# Altium PCB Copy of moveWiFi.PcbDoc
Units mil, origin at the board's own origin, x right, y up, seen from the top; angles counter-clockwise.
Board outline 2297.03 x 1980.03 mil, 2 copper layers (Top Layer, Bottom Layer); 32 components, 24 nets, 161 pads, 21 vias.
Unrouted connection lines stored in the file: 11.
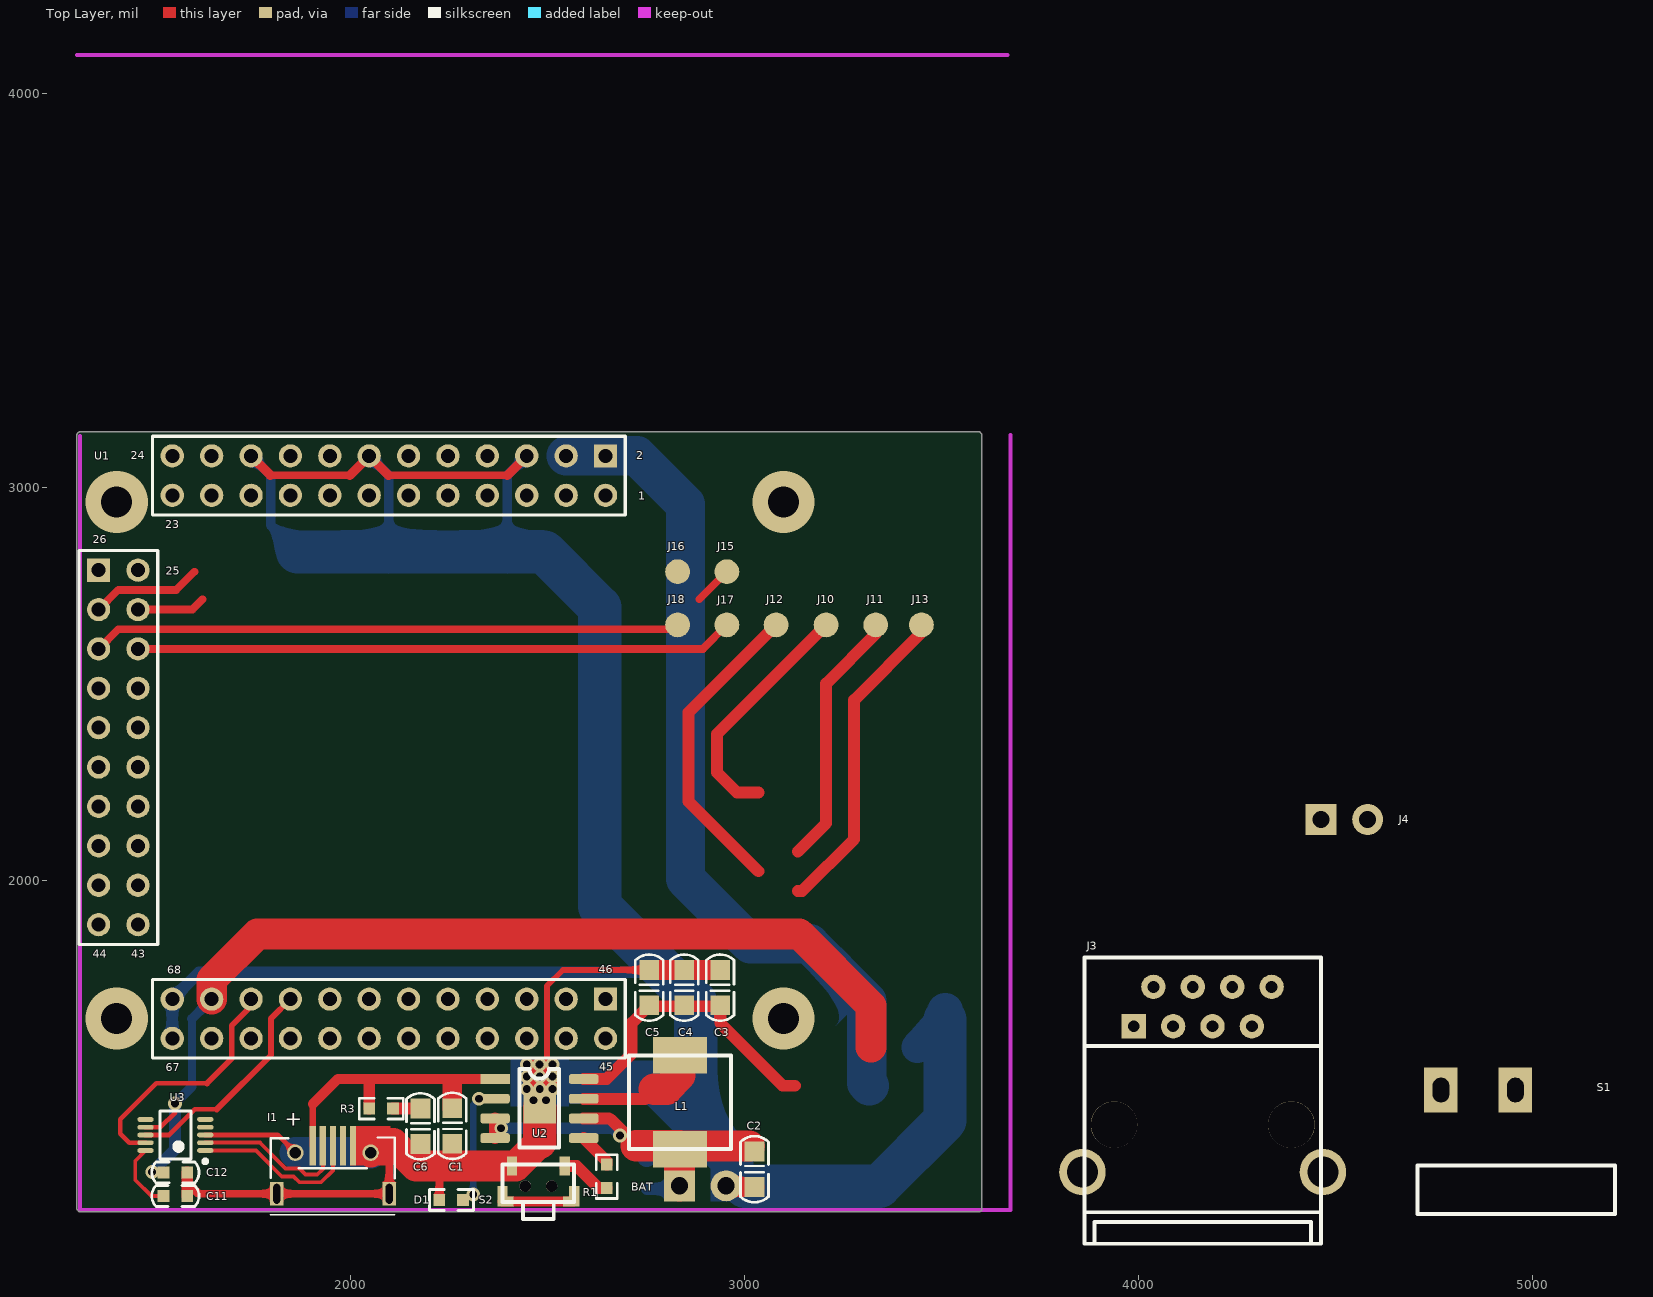
[diagram p0: Top Layer view]
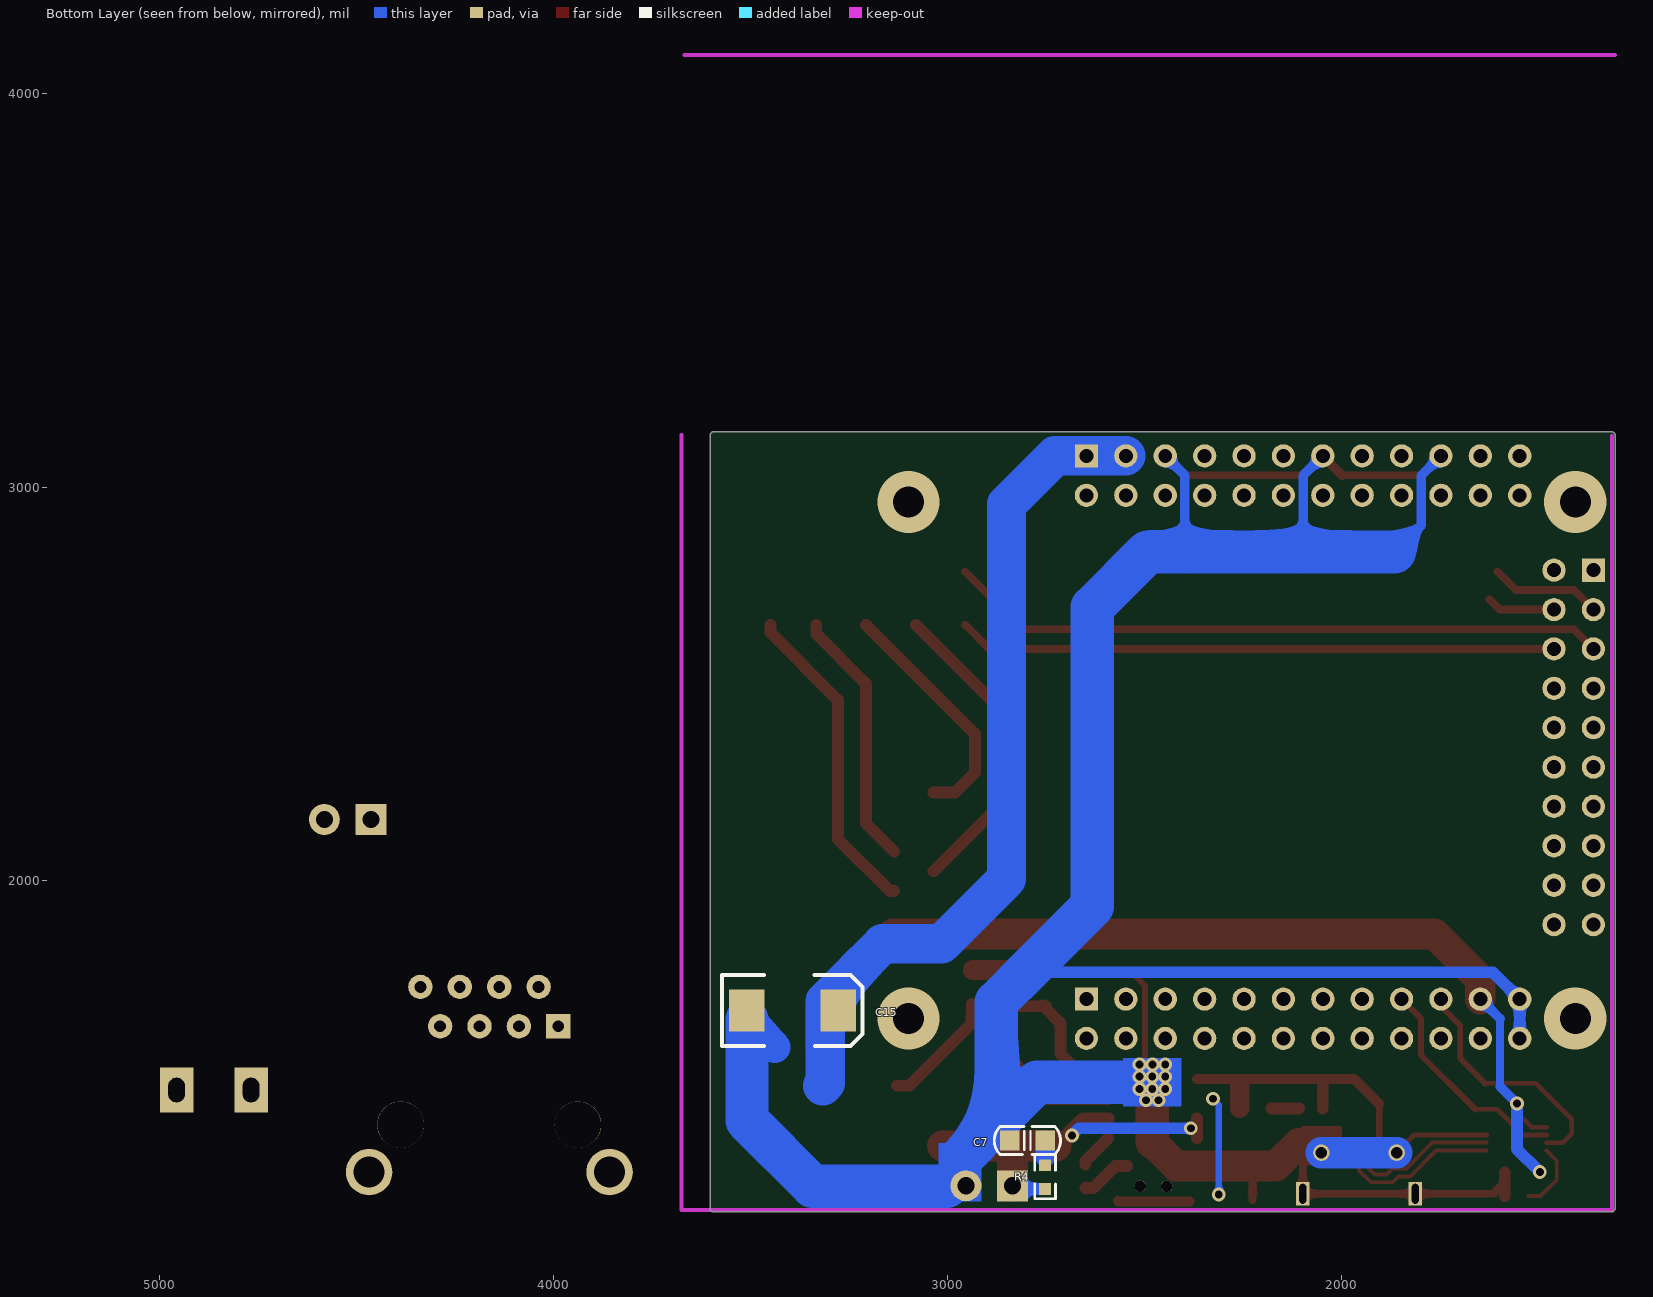
[diagram p1: Bottom Layer view, seen from below]

## Layer stack, top to bottom
Top Solder: solder mask 0.4, Solder Resist, Dk 3.5
Top Layer: signal copper 1.4
Dielectric 1: dielectric 12.6, FR-4, Dk 4.8
Bottom Layer: signal copper 1.4
Bottom Solder: solder mask 0.4, Solder Resist, Dk 3.5

## Board outline
1306.47,1164.44 cw(c1310,1168) 1304.98,1168 1304.98,3133 cw(c1310,3133) 1307.6,3137.4 cw(c1312,3135) 1312,3140.01 3595,3140.01 cw(c3595,3135) 3598.56,3138.53 3598.55,3138.55 3600.55,3136.55 3600.53,3136.56 cw(c3597,3133) 3602.01,3133 3602.01,1166 cw(c3597,1166) 3600.53,1162.44 3600.55,1162.45 3599.55,1161.45 3599.56,1161.47 cw(c3596,1165) 3596,1159.98 1313,1159.98 cw(c1313,1165) 1309.44,1161.47 1309.45,1161.45

## Design rules (kind name [scope] priority, off if disabled: settings)
Clearance [All] p1: gap=7 ignorepadtopadclearanceinfootprint=FALSE
ComponentClearance [All] p1: gap=0 collisioncheckmode=3 verticalgap=0 showdistances=FALSE
DiffPairsRouting [All] p1: maxlimit=10 minlimit=8 mostfreqgap=10 toplayer_minwidth=15 toplayer_maxwidth=15 toplayer_prefwidth=15 bottomlayer_minwidth=15 bottomlayer_maxwidth=15 bottomlayer_prefwidth=15 maxuncoupledlength=500
HoleSize [All] p1: absolutevalues=TRUE maxlimit=100 minlimit=12 maxpercent=80.000 minpercent=20.000
NetAntennae [All] p1: netantennaetolerance=10
PolygonConnect [All] p1: connectstyle=Relief reliefconductorwidth=10 reliefentries=4 polygonreliefangle="90 Angle" airgapwidth=10
RoutingVias [All] p1: holewidth=28 width=50 viastyle="Through Hole" minholewidth=28 minwidth=50 maxholewidth=28 maxwidth=50
SolderMaskExpansion [All] p1: expansion=4
Width [All] p1: maxlimit=200 minlimit=8 preferedwidth=10 minimp=50.000000 maximp=50.000000 favimp=50.000000
26 further rules are at their usual default settings.

## Components (designator, comment, footprint, x,y, rotation, side; value= is the part's Value field where it differs from the comment)
BAT "Power" "Power 2" 2835,1226 r0 top (schematic designator J2)
C1 "Cap Semi" C0805 2258,1333 r90 top value=10uF
C2 "Cap Semi" C0805 3025,1223 r90 top value=10uF
C3 "Cap Semi" C0805 2938,1774 r270 top value=22uF
C4 "Cap Semi" C0805 2847,1774 r270 top value=22uF
C5 "Cap Semi" C0805 2758,1774 r270 top value=22uF
C6 "Cap Semi" C0805 2177,1332 r90 top value=10uF
C7 "Cap Semi" C0805 2842,1341 r180 bottom value=10uF
C11 "Cap Semi" C0603 1525,1200 r0 top value=0.1uF
C12 "Cap Semi" C0603 1585,1260 r180 top value=0.1uF
C15 "Cap Pol2" C7343 3276.72,1671 r0 bottom value=220uF
D1 "LED2" R0603 2285,1190 r180 top
I1 "MicroUSB" MICROUSB 1955,1310 r270 top
J3 "RJ45-1" RG45-3 4163,1381 r180 top
J4 "Power" "Power 2" 4463.89,2156 r0 top
J10 "PAD" PAD#1 3207,2642 r0 top
J11 "PAD" PAD#1 3333,2642 r0 top
J12 "PAD" PAD#2 3080,2645 r0 top
J13 "PAD" PAD#3 3449,2644 r0 top (schematic designator 13)
J15 "PAD" PAD#4 2955,2785 r0 top
J16 "PAD" PAD#4 2830,2785 r0 top
J17 "PAD" PAD#4 2955,2650 r0 top
J18 "PAD" PAD#5 2830,2655 r0 top
L1 "Inductor" L0630 2836,1557 r270 top value=1uH
R1 "Res2" R0603 2650,1220 r90 top value=10K
R3 "Res2" R0603 2107,1422 r180 top value=2R
R4 "Res2" R0603 2752,1278 r270 bottom value=2R
S1 "Switch" SWITCHA2 4957,1469 r270 top
S2 "sw-key-lie" Key_lie 2543.47,1276.18 r180 top
U1 "NanoPi NEO Core" NANOPI_NEO_CORE2 2884,3126 r270 top locked
U2 "IP5306" eSOP8 2480,1425 r0 top
U3 "CH340E" MSOP-10 1555,1355 r180 top

## Footprints (in the part's own frame and the unit in brackets; to place one, negate y for a bottom-side part, rotate by r counter-clockwise, add the part's x,y. Pads: shape width x height; smd on the part's side, far side on the other; paste and mask are expansions set on the pad)
C0603 [mil]
  rect 30x30 smd: 1(0,0) 2(60,0)
  silkscreen extent -30,-27 90,27, body extent -1,-16 62,15, height 24
C0805 [mil]
  rect 50x50 smd: 1(0,0) 2(90,0)
  silkscreen extent -39,-36 129,36, body extent 6,-24 85,23, height 47
C7343 [mm]
  rect 2.286x2.7 smd: 1(0,0) 2(5.9,0)
  silkscreen extent -1.55,-2.3 7.5,2.3, body extent -0.86,-2.33 6.74,2.27, height 3.1
eSOP8 [mil]
  round 20 on Top Overlay: 0(-29.5,59.8)
  rect 75x25 smd: 1(-113.5,72)
  rrect50% 75x25 smd: 2(-113.5,22) 3(-113.5,-28) 4(-113.5,-78) 5(111.5,-78) 6(111.5,-28) 7(111.5,22) 8(111.5,72)
  rect 82.28x82.28 smd: 9(0,0)
  silkscreen extent -52,-102 48,98, body extent -119,-99 117,93
Key_lie [mm]
  rect 0.65x1.2 smd: 1(0,0) 2(3.4,0)
  rect 0.65x1.3 smd: ""(-0.61,1.95) ""(4.013,1.95)
  rect 0.4x0.65 smd: ""(-0.102,2.286) ""(3.505,2.286)
  round 0.75 hole 0.75: ""(0.85,1.3) ""(2.55,1.3)
  silkscreen extent -0.61,-0.1 4.03,3.4
L0630 [mm]
  rect 2.35x3.5 smd: 1(0,0) 2(6.05,0)
  silkscreen extent 0,-3.3 6.05,3.3
MICROUSB [mil]
  round 42 hole 29.53 unplated: 0(0,95.47) 0(0,-95.47)
  rect 60x35 hole 17 slot 50 at 0 deg: 0(104.33,142.72) 0(104.33,-142.72)
  rect 100x15.75 smd: 1(-18,-51.47) 2(-18,-25.87) 3(-18,-0.28) 4(-18,25.31) 5(-18,50.9)
  silkscreen extent -39,-160 158,157
MSOP-10 [mm]
  oval 1.05x0.3 smd: 1(-1.925,1) 2(-1.925,0.5) 3(-1.925,0) 4(-1.925,-0.5) 5(-1.925,-1) 6(1.925,-1) 7(1.925,-0.5) 8(1.925,0) 9(1.925,0.5) 10(1.925,1)
  silkscreen extent -2.05,-1.55 1,1.82, body extent -1.4,-1.55 1.4,1.55, height 2
NANOPI_NEO_CORE2 [mm]
  round 1.5 hole 0.9: 1(3.734,-6.02) 3(3.734,-8.56) 4(1.194,-8.56) 5(3.734,-11.1) 6(1.194,-11.1) 7(3.734,-13.64) 8(1.194,-13.64) 9(3.734,-16.18) 10(1.194,-16.18) 11(3.734,-18.72) 12(1.194,-18.72) 13(3.734,-21.26) 14(1.194,-21.26) 15(3.734,-23.8) 16(1.194,-23.8) 17(3.734,-26.34) 18(1.194,-26.34) 19(3.734,-28.88) 20(1.194,-28.88) 21(3.734,-31.42) 22(1.194,-31.42) 23(3.734,-33.96) 24(1.194,-33.96) 25(8.56,-36.17) 27(11.1,-36.17) 28(11.1,-38.71) 29(13.64,-36.17) 30(13.64,-38.71) 31(16.18,-36.17) 32(16.18,-38.71) 33(18.72,-36.17) 34(18.72,-38.71) 35(21.26,-36.17) 36(21.26,-38.71) 37(23.8,-36.17) 38(23.8,-38.71) 39(26.34,-36.17) 40(26.34,-38.71) 41(28.88,-36.17) 42(28.88,-38.71) 43(31.42,-36.17) 44(31.42,-38.71) 45(38.76,-6.02) 47(38.76,-8.56) 48(36.22,-8.56) 49(38.76,-11.1) 50(36.22,-11.1) 51(38.76,-13.64) 52(36.22,-13.64) 53(38.76,-16.18) 54(36.22,-16.18) 55(38.76,-18.72) 56(36.22,-18.72) 57(38.76,-21.26) 58(36.22,-21.26) 59(38.76,-23.8) 60(36.22,-23.8) 61(38.76,-26.34) 62(36.22,-26.34) 63(38.76,-28.88) 64(36.22,-28.88) 65(38.76,-31.42) 66(36.22,-31.42) 67(38.76,-33.96) 68(36.22,-33.96)
  rect 1.5x1.5 hole 0.9: 2(1.194,-6.02) 26(8.56,-38.71) 46(36.22,-6.02)
  silkscreen extent -0.08,-39.98 40.03,-4.75
PAD#1 [mm]
  round 1.6 smd: 1(0,0.203)
PAD#2 [mm]
  round 1.6 smd: 1(0,0.127)
PAD#3 [mm]
  round 1.6 smd: 1(0,0.152)
PAD#4 [mm]
  round 1.6 smd: 1(0,0)
PAD#5 [mm]
  round 1.6 smd: 1(0,-0.127)
"Power 2" [mm]
  rect 2x2 hole 1.1: 1(0,0)
  round 2 hole 1.1: 2(3,0)
R0603 [mil]
  rect 30x30 smd: 1(0,0) 2(60,0)
  silkscreen extent -27,-27 85,27, body extent -1,-16 62,15, height 18
RG45-3 [mil]
  round 118.11 hole 78.74: 0(-305.12,120.08) 0(305.12,120.08)
  round 118.11 hole 118.11: 0(-225,0) 0(225,0)
  rect 62x62 hole 30: 1(175,-250)
  round 62 hole 30: 2(125,-350) 3(75,-250) 4(25,-350) 5(-25,-250) 6(-75,-350) 7(-125,-250) 8(-175,-350)
  silkscreen extent -300,-425 300,302, body extent -348,-543 345,401, height 573
SWITCHA2 [mil]
  rect 115x85 hole 42 slot 62 at 0 deg: 1(0,0) 2(0,-188.98)
  silkscreen extent 192,-248 315,253

## Part data
C1 C2 C3 C4 C5 C6 C7 C11 C12: "Capacitor (Semiconductor SIM Model)", LatestRevisionDate=29-May-2009, LatestRevisionNote="IPC-7351 Footprint Added.", PackageDescription="Chip Capacitor", PackageReference=C1206, Published=8-Jun-2000, Publisher="Altium Limited"
C15: "Polarized Capacitor (Axial)", LatestRevisionDate=17-Jul-2002, LatestRevisionNote="Re-released for DXP Platform.", PackageDescription="Polarized Capacitor; 2 Leads", PackageReference=POLAR0.8, Published=8-Jun-2000, Publisher="Altium Limited"
D1: "Typical RED, GREEN, YELLOW, AMBER GaAs LED", LatestRevisionDate=17-Jul-2002, LatestRevisionNote="Re-released for DXP Platform.", PackageDescription="SM LED; 2 Flat Leads", PackageReference=3.2X1.6X1.1, PackageVersion=Feb-2002, Published=8-Jun-2000, Publisher="Altium Limited"
J3: library part RJ45-3
R1 R3 R4: "Resistor", LatestRevisionDate=17-Jul-2002, LatestRevisionNote="Re-released for DXP Platform.", PackageDescription="Axial Device, Thru-Hole; 2 Leads; 0.4 in Pin Spacing", PackageReference=AXIAL-0.4, Published=8-Jun-2000, Publisher="Altium Limited"
S1: library part Switch2
U1: library part NanoPi_NEO_Core
L1: Code_IEC=1005, Code_JEITA=0402, LatestRevisionDate=29-May-2009, LatestRevisionNote="IPC-7351 Footprint Added.", PackageDescription="Chip Inductor", PackageReference=0402-A, Published=8-Jun-2000, Publisher="Altium Limited"

## Via types
v1: diameter 35, hole 20, Top Layer to Bottom Layer, 17 vias
v2: diameter 157.48, hole 78.74, Top Layer to Bottom Layer, 4 vias

## Nets (pads, with @x,y where several pads share a name; then routed paths per layer and width w, separated by ;. In a path a pad name is that pad's centre, name@x,y a point inside that pad or via, vN(x,y) a via of type N, cw(c..) or ccw(c..) an arc to the next point about the centre after c; other vN are vias at no path point)
GND: BAT.2 C1.1 C2.1 C3.1 C4.1 C5.1 C6.1 C7.1 C11.2 C12.1 C15.2 D1.2 I1.0 I1.5 J4.2 S2.2 U1.6 U1.14 U1.20 U1.67 U1.68 U2.9 U3.3 | length 9261.7
  Top Layer w0: C3.1@2936,1774 C3.1@2938,1772
  Top Layer w12: U3.3 1814.53,1355 I1.0@1859.53,1310
  Top Layer w15: v1(2512,1534) 2498,1548 2498,1733 2539,1774 C5.1
  Top Layer w18: 1796,3030 1998,3030 ; 2096,3030 2398,3030
  Top Layer w20: 1585,1234 1613.33,1205.67 1812.28,1205.67 2097.72,1205.67 2097.72,1323.72 2108,1334 ; D1.2 2225,1268.18 2233,1276.18
  Top Layer w24: U1.20 1796,3030 ; 1998,3030 U1.14 2096,3030 ; 2398,3030 U1.6
  Top Layer w30: C11.2 1585,1234 C12.1
  Top Layer w50: C5.1 C4.1 C3.1@2936,1774 ; BAT.2 2956.11,1223 C2.1
  Top Layer w75: I1.0@2050.47,1310 2050.47,1320.47 2064,1334 2108,1334 ; S2.2 S2.2@2419.18,1276.18
  Top Layer w78: 2108,1334 2165.82,1276.18 2233,1276.18 S2.2 ; S2.2@2419.18,1276.18 2480,1337
  Top Layer w85: 2480,1337 U2.9
  Bottom Layer w0: 3416,1578 3427.5,1589.5
  Bottom Layer w24: U1.20 1797,3029 1797,2903 1865,2835 ; U1.14 2097,3029 2097,2835 ; 2397,2835 2397,3029 U1.6
  Bottom Layer w30: U1.67 U1.68 1615,1768 2766,1768 2783,1785
  Bottom Layer w80: I1.0@1859.53,1310 I1.0@2050.47,1310 ; 3439,1578 C15.2@3509,1648
  Bottom Layer w90: C15.2@3509,1648 C15.2
  Bottom Layer w110: 1865,2835 2097,2835 2397,2835 2492,2835 2632,2695 2632,1936 2783,1785 2876,1692 2876,1385 ; 2532,1489 2772,1489 2876,1385 ; 2968,1293 2876,1385 ; 3002,1225 3342,1225 3509,1392 C15.2@3509,1648
  other v1: 2464,1443 2496,1443 2447,1472 2480,1472 2512,1472 2447,1503 2480,1503 2512,1503 2447,1534 2479,1534
LAN_RX+: J17.1 U1.29 | length 1520.3
  Top Layer w20: U1.29 2894,2589 J17.1
LAN_RX-: J18.1 U1.30 | length 1495.3
  Top Layer w20: U1.30 1410,2639 2819,2639 J18.1
LAN_TX+: J15.1 U1.27 | length 273.8
  Top Layer w20: U1.27 1598,2689 1624,2715 ; 2885,2715 J15.1
LAN_TX-: J16.1 U1.28 | length 282.8
  Top Layer w20: U1.28 1410,2739 1557,2739 1603,2785
Net13_1: J3.1 J13.1 | length 812.3
  Top Layer w30: 3135,1974.61 3146.61,1974.61 3278,2106 3278,2459 3449,2630 J13.1
NetC1_2: C1.2 I1.1 R3.2 U2.1 | length 725.8
  Top Layer w16: I1.1 1903.53,1433.53
  Top Layer w25: 1903.53,1433.53 1967,1497 ; 1971,1497 2056,1497 ; 2052,1497 U2.1
  Top Layer w30: R3.2 2047,1492
  Top Layer w50: C1.2 2258,1484
NetC2_2: BAT.1 C2.2 L1.2 R4.2 U2.3 U2.4 U2.6 | length 1029
  Top Layer w0: C2.2@3012,1327 C2.2@3025,1314
  Top Layer w30: U2.4 U2.3 ; U2.6@2590.5,1397 U2.6 ; U2.6@2594.5,1397 2655,1397 ; 2660,1395 2727,1328 ; 2725,1330 2725,1327 2726,1326
  Top Layer w50: BAT.1@2826,1217 BAT.1
  Top Layer w79: BAT.1 2835,1326 2836,1327 C2.2@3012,1327
  Top Layer w80: 2725,1327 L1.2@2836,1327 ; L1.2@2835,1326 L1.2@2838,1326
  Bottom Layer w30: v1(2382,1372) 2666,1372 v1(2684,1354) ; R4.2 2827,1218 BAT.1
NetC3_2: C3.2 C4.2 C5.2 S1.2 U2.8 | length 770.9
  Top Layer w30: U2.8 2649,1497 ; 2650,1497 2649,1497 ; C5.2@2749,1682 C5.2@2756,1682 ; C3.2@2927,1682 C5.2@2760,1682 ; 2938,1639 3096,1481 ; 2938,1644 C3.2 C3.2@2938,1688 ; 3096,1480 3128.02,1480 ; 2649,1497 2713,1561 2713,1639 C5.2@2756,1682 ; C5.2@2756,1682 C5.2@2760,1682 ; C5.2@2756,1682 C5.2 C5.2@2760,1682
NetC6_2: C6.2 R3.1 | length 70
  Top Layer w30: R3.1 C6.2
NetC7_2: C7.2 R4.1 | length 42
  Bottom Layer w50: 2752,1299 C7.2
NetC11_1: C11.1 U3.10 | length 174.5
  Top Layer w10: U3.10 1453,1289.42 1453,1241 1494,1200 C11.1
NetC12_2: C12.2 C15.1 J4.1 S1.1 U1.2 U1.4 U1.66 U3.7 | length 4677.4
  Top Layer w12: U3.7 1516.68,1374.68 1554,1412 v1(1554,1435)
  Top Layer w78: U1.66 1647,1749 1763,1865 3139,1865 3320.89,1683.11 3320.89,1578
  Bottom Layer w20: 1597,1478 1597,1650
  Bottom Layer w24: v1(1554,1435) 1597,1478 ; 1597,1650 U1.66
  Bottom Layer w30: v1(1496,1261) 1554,1319 v1(1554,1435)
  Bottom Layer w100: U1.4 U1.2 2727,3079 2850,2956 2850,2005 3015,1840 3165,1840 3310,1695 3310,1578 3310,1487 3317,1480
NetD1_1: D1.1 U2.2 | length 249.2
  Bottom Layer w16: v1(2311,1204) 2311,1432 v1(2326,1447)
NetJ3_2: J3.2 J12.1 | length 790.7
  Top Layer w30: 3035,2024.61 2858,2201.61 2858,2428 J12.1
NetJ3_3: J3.3 J11.1 | length 657.4
  Top Layer w30: 3135,2074.61 3207,2146.61 3207,2501 3333,2627 J11.1
NetJ3_6: J3.6 J10.1 | length 615.6
  Top Layer w30: 3035,2224.61 2980.39,2224.61 2930,2275 2930,2373 J10.1
NetL1_1: L1.1 U2.7 | length 321.7
  Top Layer w30: U2.7@2591.5,1446 2747,1446 ; 2747,1447 2771,1471 ; 2836,1505 L1.1@2836,1558.19
  Top Layer w80: 2771,1471 2802,1471 ; 2802,1472 2836,1506
NetR1_1: R1.1 S2.1 | length 129.8
  Top Layer w30: S2.1 2573.82,1276.18 2630,1220 R1.1
NetR1_2: R1.2 U2.5 | length 91.2
  Top Layer w30: U2.5 2650,1288.5 R1.2
RXD0: U1.62 U3.8 | length 568.2
  Top Layer w12: U3.8 1539,1355 1604,1420 1660,1420
  Top Layer w15: 1660,1420 1798,1558 1798,1651 U1.62 U1.62@1847,1697
TXD0: U1.64 U3.9 | length 628.7
  Top Layer w12: U3.9 1437.69,1335.31 1415,1358 1415,1395 1506,1486 1635,1486
  Top Layer w15: 1635,1486 1698,1549 1698,1633 1747,1682 U1.64
UD+: I1.3 U3.1 | length 432.9
  Top Layer w10: U3.1 1759.37,1315.63 1825,1250 1855,1250 1870,1235 1925,1235 1954.72,1264.72 I1.3
UD-: I1.2 U3.2 | length 396.3
  Top Layer w10: U3.2 1769.69,1335.31 1835,1270 1870,1270 1885,1255 1915,1255 1929.13,1269.13 I1.2
pads on no net: I1.4 J3.0 J3.4 J3.5 J3.7 J3.8 S2. U1.1 U1.3 U1.5 U1.7 U1.8 U1.9 U1.10 U1.11 U1.12 U1.13 U1.15 U1.16 U1.17 U1.18 U1.19 U1.21 U1.22 U1.23 U1.24 U1.25 U1.26 U1.31 U1.32 U1.33 U1.34 U1.35 U1.36 U1.37 U1.38 U1.39 U1.40 U1.41 U1.42 U1.43 U1.44 U1.45 U1.46 U1.47 U1.48 U1.49 U1.50 U1.51 U1.52 U1.53 U1.54 U1.55 U1.56 U1.57 U1.58 U1.59 U1.60 U1.61 U1.63 U1.65 U2.0 U3.4 U3.5 U3.6
copper on no net: | length 182.3
  Top Layer w25: 2385,1186.18 2566.18,1186.18 2567,1187
  other v2: 1406,1651.25 3099.37,1651.25 1406,2962.28 3099.37,2962.28

## Polygon pours and split planes (outlines as drawn)
no net on Top Layer "Top Layer-No Net 2" (solid, pour order 30): 3595.29,3135.12
no net on Top Layer "Top Layer-No Net 2" (solid, pour order 6): 1312,3135
no net on Top Layer "Top Layer-No Net" (solid, pour order 2): 2000,1380
no net on Top Layer "Top Layer-No Net 1" (solid, pour order 0): 2000,1380

## Keep-outs
Keep-Out Layer:
  lines w0: 3596,1165 3597,1166
  lines w10: 1305,4097 3667.2,4097 ; 1313,3130 1313,1165 3675.2,1165 ; 3675,1165 3675,3132

## Other copper
Top Layer:
  rectangle net GND: 2437,1466 2525,1546
  rectangle net GND: 1998,1278 2101,1378
Bottom Layer:
  rectangle net GND: 2914,1186 3023,1335
  rectangle net GND: 2406,1427 2554,1551

## Silkscreen, mask and mechanical layers (free items; w line width, h text height)
Top Solder:
  rectangle: 2001,1354 2048,1382
  lines w16: 1903.53,1328 1903.53,1433.53
  lines w25: 1903.53,1433.53 1967,1497 2052,1497 2366.5,1497
  lines w30: 2591.5,1397 2655,1397 ; 2591.5,1447 2747,1447 ; 2591.5,1497 2650,1497 2713,1560 2713,1638 2758,1683 ; 2658,1397 2725,1330 ; 2760,1682 2938,1682 2938,1638 3096,1480
  lines w80: 2731,1326 2835,1326 ; 2771,1471 2802,1471 2836,1505

## Text inside footprints (layer, text, board x,y; h text height)
I1: Top Overlay "+" at 1833,1379 h39.37
U1: Top Overlay "67" at 1530,1517 h20; Top Overlay "68" at 1534,1764 h20; Top Overlay "45" at 2631,1518 h20; Top Overlay "46" at 2630,1765 h20; Top Overlay "43" at 1443,1805 h20; Top Overlay "44" at 1345,1805 h20; Top Overlay "26" at 1345,2857 h20; Top Overlay "25" at 1531,2777 h20; Top Overlay "2" at 2725,3070 h20; Top Overlay "1" at 2730,2968 h20; Top Overlay "24" at 1442,3070 h20; Top Overlay "23" at 1529,2895 h20